# Altium PCB 底板201604281.PcbDoc (part 2 of 2)
Units mm, origin at the board's own origin, x right, y up, seen from the top; angles counter-clockwise.
Board outline 123.5 x 102.51 mm, 2 copper layers (Top Layer, Bottom Layer); 216 components, 211 nets, 709 pads, 236 vias.
Unrouted connection lines stored in the file: 63.
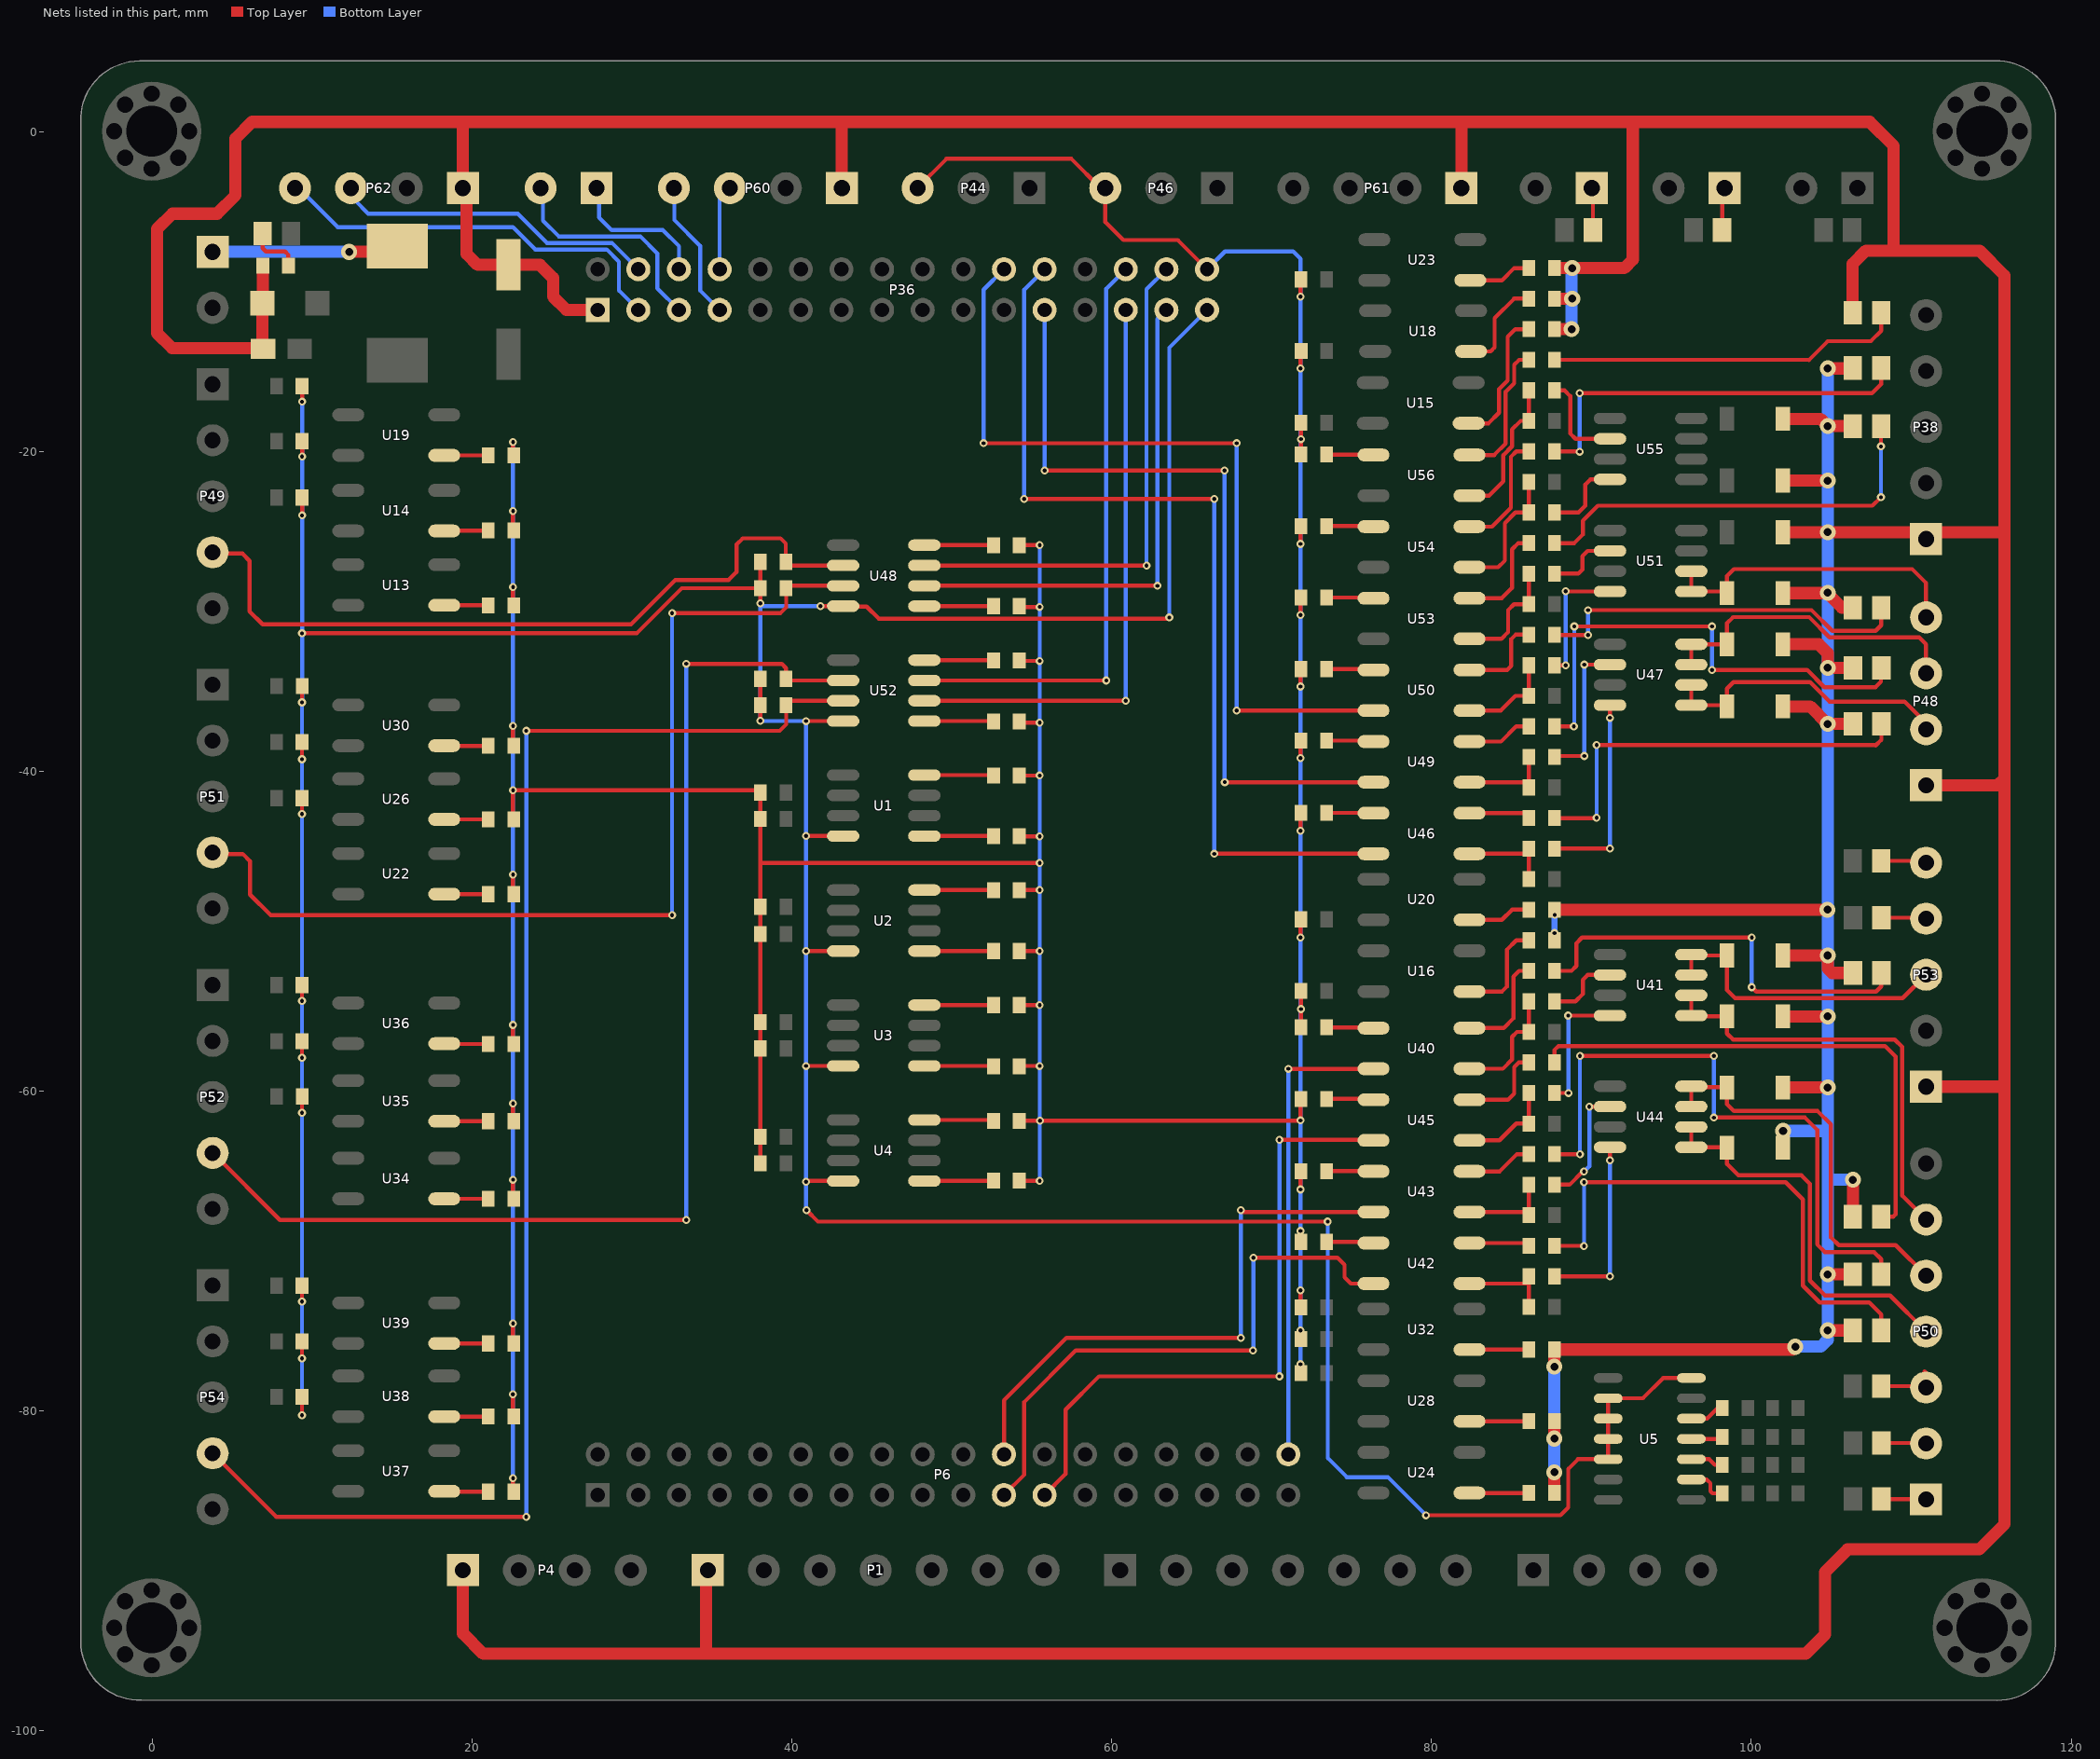
[diagram p2: the nets of this part, all layers, seen from the top]

## Via types
v1: diameter 0.5, hole 0.25, Top Layer to Bottom Layer, 198 vias
v2: diameter 1, hole 0.5, Top Layer to Bottom Layer, 29 vias
v3: diameter 0.6, hole 0.3, Top Layer to Bottom Layer, 9 vias

## Nets (pads, with @x,y where several pads share a name; then routed paths per layer and width w, separated by ;. In a path a pad name is that pad's centre, name@x,y a point inside that pad or via, vN(x,y) a via of type N, cw(c..) or ccw(c..) an arc to the next point about the centre after c; other vN are vias at no path point) (continued)
NetD39_K: D39.K R97.1 | length 32
  Top Layer w0.254: R97.1@87.681,-69.662 89.525,-69.662 v1(89.535,-69.672) ; v1(89.535,-65.684) 102.143,-65.684 103.226,-66.767 103.226,-72.161 104.267,-73.203 107.366,-73.203 108.119,-73.956 D39.K@108.119,-74.955
  Bottom Layer w0.254: v1(89.535,-69.672) v1(89.535,-65.684)
NetD40_K: D40.K R101.2 | length 26.3
  Top Layer w0.254: R101.2@87.681,-52.47 88.754,-52.47 89.052,-52.172 89.052,-50.749 89.408,-50.394 v1(100.025,-50.394) ; v1(100.025,-53.492) 100.305,-53.772 107.798,-53.772 108.119,-53.45 108.119,-52.629 D40.K@108.128,-52.638
  Bottom Layer w0.254: v1(100.025,-53.492) v1(100.025,-50.394)
NetD41_A: D41.A R106.2 | length 3.4
  Top Layer w0.254: D41.A@6.908,-6.375 6.908,-7.289 7.112,-7.493 8.306,-7.493 8.522,-7.709 R106.2@8.522,-8.382
NetD42_K: D42.K R105.1 | length 39.3
  Top Layer w0.254: R105.1@87.681,-63.931 v1(89.28,-63.931) ; v1(89.28,-57.786) v1(97.663,-57.785) ; v1(97.663,-61.646) 103.353,-61.646 104.115,-62.408 104.115,-69.571 104.597,-70.053 107.671,-70.053 108.119,-70.502 D42.K@108.119,-71.45
  Bottom Layer w0.254: v1(89.28,-63.931) v1(89.28,-57.786) ; v1(97.663,-61.646) v1(97.663,-57.785)
NetD43_K: D43.K R110.2 | length 33.3
  Top Layer w0.254: R110.2@87.681,-58.2 87.681,-57.429 87.935,-57.175 108.356,-57.175 109.017,-57.836 109.017,-67.691 108.864,-67.843 D43.K@108.119,-67.843
NetD49_K: D49.K R114.1 | length 26.1
  Top Layer w0.254: R114.1@87.681,-42.919 90.304,-42.919 v1(90.322,-42.901) ; v1(90.322,-38.354) 107.747,-38.354 107.772,-38.379 108.129,-38.023 D49.K@108.129,-37.033
  Bottom Layer w0.254: v1(90.322,-42.901) v1(90.322,-38.354)
NetD51_K: D51.K R120.1 | length 30.8
  Top Layer w0.254: R120.1@87.681,-37.188 87.683,-37.186 v1(88.9,-37.186) ; v1(88.925,-30.937) v1(97.536,-30.937) ; v1(97.536,-33.655) 103.48,-33.655 104.559,-34.734 107.759,-34.734 108.102,-34.392 108.102,-33.554 D51.K@108.129,-33.528
  Bottom Layer w0.254: v1(88.9,-37.186) 88.925,-37.16 v1(88.925,-30.937) ; v1(97.536,-33.655) v1(97.536,-30.937)
NetD54_K: D54.K R126.1 | length 26.6
  Top Layer w0.254: R126.1@87.681,-25.727 88.929,-25.727 89.459,-25.197 89.459,-24.333 90.399,-23.393 107.569,-23.393 v1(108.102,-22.86) ; v1(108.102,-19.685) 108.102,-18.432 D54.K@108.119,-18.415
  Bottom Layer w0.254: v1(108.102,-22.86) v1(108.102,-19.685)
NetD57_K: D57.K R131.1 | length 23.8
  Top Layer w0.254: R131.1@87.681,-31.457 87.694,-31.471 v1(89.789,-31.471) ; v1(89.789,-29.921) 103.759,-29.921 105.054,-31.217 107.772,-31.217 108.119,-30.87 D57.K@108.119,-29.769
  Bottom Layer w0.254: v1(89.789,-31.471) v1(89.789,-29.921)
NetD58_K: D58.K R138.1 | length 25.3
  Top Layer w0.254: R138.1@87.681,-19.996 89.236,-19.996 v1(89.256,-20.015) ; v1(89.256,-16.358) 107.544,-16.358 108.119,-15.782 D58.K@108.119,-14.783
  Bottom Layer w0.254: v1(89.256,-20.015) v1(89.256,-16.358)
NetD59_K: D59.K R142.1 | length 22.3
  Top Layer w0.254: R142.1@87.681,-14.265 103.565,-14.265 ; 103.591,-14.291 104.775,-13.106 107.467,-13.106 108.119,-12.455 D59.K@108.119,-11.328
NetR1_2: R1.2 U5.12 | length 2.2
  Top Layer w0.254: U5.12@96.245,-80.467 97.231,-80.467 97.892,-79.807 R1.2@98.184,-79.807
NetR2_2: R2.2 U5.11 | length 2
  Top Layer w0.254: U5.11@96.245,-81.737 98.057,-81.737 R2.2@98.184,-81.61
NetR3_2: R3.2 U5.10 | length 2.1
  Top Layer w0.254: U5.10@96.245,-83.007 97.358,-83.007 97.714,-83.363 R3.2@98.184,-83.363
NetR4_2: R4.2 U5.9 | length 2.6
  Top Layer w0.254: U5.9@96.245,-84.277 97.206,-84.277 97.434,-84.506 97.434,-85.014 97.561,-85.141 R4.2@98.184,-85.141
NetR11_1: R11.1 U1.4 | length 4.3
  Top Layer w0.254: U1.4@48.285,-40.234 52.591,-40.234 R11.1@52.616,-40.259
NetR12_1: R12.1 U2.4 | length 4.3
  Top Layer w0.254: U2.4@48.285,-47.422 R12.1@52.616,-47.422
NetR17_1: R17.1 U1.1 | length 4.3
  Top Layer w0.254: U1.1@48.285,-44.044 R17.1@52.616,-44.044
NetR18_1: R18.1 U2.1 | length 4.3
  Top Layer w0.254: U2.1@48.285,-51.232 R18.1@52.616,-51.232
NetR19_1: R19.1 U3.4 | length 4.3
  Top Layer w0.254: U3.4@48.285,-54.61 R19.1@52.616,-54.61
NetR20_1: R20.1 U4.4 | length 4.4
  Top Layer w0.254: U4.4@48.285,-61.798 52.565,-61.798 R20.1@52.616,-61.849
NetR25_1: R25.1 U3.1 | length 4.3
  Top Layer w0.254: U3.1@48.285,-58.42 52.591,-58.42 R25.1@52.616,-58.445
NetR26_1: R26.1 U4.1 | length 4.3
  Top Layer w0.254: U4.1@48.285,-65.608 52.591,-65.608 R26.1@52.616,-65.583
NetR42_1: R42.1 U13.1 | length 2.7
  Top Layer w0.254: U13.1@18.263,-29.616 R42.1@20.942,-29.616
NetR44_1: R44.1 U14.1 | length 2.7
  Top Layer w0.254: U14.1@18.288,-24.943 R44.1@20.942,-24.943
NetR46_1: R46.1 U15.1 | length 8.7
  Top Layer w0.254: U15.1@82.321,-18.237 83.566,-18.237 84.226,-17.577 84.226,-16.104 84.76,-15.57 84.76,-12.827 85.232,-12.355 R46.1@86.081,-12.355
NetR47_1: R47.1 U16.1 | length 6.4
  Top Layer w0.254: U16.1@82.372,-53.762 84.414,-53.762 84.709,-53.467 84.709,-51.156 85.305,-50.559 R47.1@86.081,-50.559
NetR52_1: R52.1 U18.1 | length 6
  Top Layer w0.254: U18.1@82.474,-13.741 83.693,-13.741 83.947,-13.487 83.947,-11.659 85.161,-10.445 R52.1@86.081,-10.445
NetR53_1: R53.1 U19.1 | length 2.8
  Top Layer w0.254: U19.1@18.263,-20.244 R53.1@21.019,-20.244
NetR55_1: R55.1 U20.1 | length 4
  Top Layer w0.254: U20.1@82.372,-49.283 84.397,-49.283 85.031,-48.649 R55.1@86.081,-48.649
NetR60_1: R60.1 U22.1 | length 2.7
  Top Layer w0.254: U22.1@18.263,-47.676 R60.1@20.968,-47.676
NetR62_1: R62.1 U23.1 | length 4
  Top Layer w0.254: U23.1@82.423,-9.296 84.404,-9.296 85.166,-8.534 R62.1@86.081,-8.534
NetR63_1: R63.1 U24.1 | length 3.7
  Top Layer w0.254: U24.1@82.372,-85.115 R63.1@86.081,-85.115 R63.1@86.055,-85.141
NetR68_1: R68.1 U26.1 | length 2.7
  Top Layer w0.254: U26.1@18.263,-43.002 R68.1@20.968,-43.002
NetR71_1: R71.1 U28.1 | length 3.7
  Top Layer w0.254: U28.1@82.372,-80.636 86.064,-80.636 R71.1@86.081,-80.62
NetR76_1: R76.1 U30.1 | length 2.6
  Top Layer w0.254: U30.1@18.274,-38.405 R76.1@20.866,-38.405
NetR79_1: R79.1 U32.1 | length 3.7
  Top Layer w0.254: U32.1@82.372,-76.157 86.073,-76.157 R79.1@86.081,-76.149
NetR84_1: R84.1 U34.1 | length 2.7
  Top Layer w0.254: U34.1@18.263,-66.726 R84.1@20.968,-66.726
NetR86_1: R86.1 U35.1 | length 2.7
  Top Layer w0.254: U35.1@18.263,-61.874 R86.1@20.968,-61.874
NetR88_1: R88.1 U36.1 | length 2.7
  Top Layer w0.254: U36.1@18.288,-57.048 R88.1@20.968,-57.048
NetR90_1: R90.1 U37.1 | length 2.7
  Top Layer w0.254: U37.1@18.288,-85.039 R90.1@20.968,-85.039
NetR92_1: R92.1 U38.1 | length 2.7
  Top Layer w0.254: U38.1@18.263,-80.34 R92.1@20.968,-80.34
NetR94_1: R94.1 U39.1 | length 2.7
  Top Layer w0.254: U39.1@18.263,-75.768 R94.1@20.968,-75.768
NetR96_1: R96.1 U40.1 | length 2.9
  Top Layer w0.254: R96.1@73.431,-56.007 U40.1@76.328,-56.007
NetR97_2: R97.2 U42.4 | length 3.8
  Top Layer w0.254: U42.4@82.372,-69.488 85.907,-69.488 R97.2@86.081,-69.662
NetR98_2: R98.2 R99.2 U40.3 | length 7.4
  Top Layer w0.254: U40.3@82.372,-58.591 84.462,-58.591 85.039,-58.014 85.039,-56.591 85.34,-56.29 R99.2@86.081,-56.29 R98.2@86.081,-54.38
NetR100_1: R100.1 U42.1 | length 2.9
  Top Layer w0.254: R100.1@73.431,-69.418 U42.1@76.302,-69.418
NetR101_1: R101.1 U40.4 | length 6.7
  Top Layer w0.254: U40.4@82.372,-56.051 84.513,-56.051 85.115,-55.448 85.115,-52.832 85.478,-52.47 R101.1@86.081,-52.47
NetR102_2: R102.2 R103.2 U42.3 | length 5.5
  Top Layer w0.254: U42.3@82.372,-72.028 R102.2@85.998,-72.028 ; R103.2@86.081,-73.482 R102.2@86.081,-71.572
NetR104_1: R104.1 U43.1 | length 2.9
  Top Layer w0.254: R104.1@73.431,-64.999 U43.1@76.362,-64.999
NetR105_2: R105.2 U43.4 | length 4.2
  Top Layer w0.254: U43.4@82.372,-65.009 84.267,-65.009 85.345,-63.931 R105.2@86.081,-63.931
NetR107_2: R107.2 R108.2 U43.3 | length 5.7
  Top Layer w0.254: U43.3@82.372,-67.549 85.878,-67.549 R108.2@86.081,-67.752 R107.2@86.081,-65.841
NetR109_1: R109.1 U45.1 | length 2.9
  Top Layer w0.254: R109.1@73.431,-60.477 U45.1@76.32,-60.477
NetR110_1: R110.1 U45.4 | length 5.6
  Top Layer w0.254: U45.4@82.372,-60.53 84.783,-60.53 85.166,-60.147 85.166,-58.496 85.462,-58.2 R110.1@86.081,-58.2
NetR111_2: R111.2 R112.2 U45.3 | length 6.1
  Top Layer w0.254: U45.3@82.372,-63.07 84.25,-63.07 85.299,-62.021 R112.2@86.081,-62.021 R111.2@86.081,-60.111
NetR113_1: R113.1 U46.1 | length 2.9
  Top Layer w0.254: R113.1@73.431,-42.596 U46.1@76.354,-42.596
NetR114_2: R114.2 U46.4 | length 3.4
  Top Layer w0.254: U46.4@82.372,-42.614 R114.2@85.776,-42.614
NetR115_1: R115.1 U48.4 | length 4.3
  Top Layer w0.254: U48.4@48.285,-25.857 R115.1@52.616,-25.857
NetR116_2: R116.2 R118.2 U46.3 | length 5.8
  Top Layer w0.254: U46.3@82.372,-45.154 85.756,-45.154 R116.2@86.081,-44.829 R118.2@86.081,-46.739
NetR119_1: R119.1 U49.1 | length 2.9
  Top Layer w0.254: R119.1@73.431,-38.075 U49.1@76.312,-38.075
NetR120_2: R120.2 U49.4 | length 4.1
  Top Layer w0.254: U49.4@82.372,-38.135 84.344,-38.135 85.291,-37.188 R120.2@86.081,-37.188
NetR122_1: R122.1 U48.1 | length 4.3
  Top Layer w0.254: U48.1@48.285,-29.667 R122.1@52.616,-29.667
NetR123_2: R123.2 R124.2 U49.3 | length 5.8
  Top Layer w0.254: U49.3@82.372,-40.675 85.747,-40.675 R124.2@86.081,-41.008 R123.2@86.081,-39.098
NetR125_1: R125.1 U50.1 | length 2.9
  Top Layer w0.254: R125.1@73.431,-33.604 U50.1@76.321,-33.604
NetR126_2: R126.2 U53.4 | length 6.6
  Top Layer w0.254: U53.4@82.372,-29.177 84.387,-29.177 85.039,-28.524 85.039,-26.111 85.424,-25.727 R126.2@86.081,-25.727
NetR127_2: R127.2 R128.2 U50.3 | length 6
  Top Layer w0.254: U50.3@82.372,-36.196 84.327,-36.196 85.245,-35.278 R128.2@86.081,-35.278 R127.2@86.081,-33.367
NetR129_1: R129.1 U52.4 | length 4.3
  Top Layer w0.254: U52.4@48.285,-33.045 52.591,-33.045 R129.1@52.616,-33.071
NetR130_1: R130.1 U53.1 | length 2.9
  Top Layer w0.254: R130.1@73.431,-29.134 U53.1@76.329,-29.134
NetR131_2: R131.2 U50.4 | length 5.6
  Top Layer w0.254: U50.4@82.372,-33.656 84.734,-33.656 84.988,-33.401 84.988,-31.725 85.256,-31.457 R131.2@86.081,-31.457
NetR133_2: R133.2 R135.2 U53.3 | length 7.3
  Top Layer w0.254: U53.3@82.372,-31.717 84.361,-31.717 84.785,-31.293 84.785,-29.921 85.159,-29.547 R135.2@86.081,-29.547 R133.2@86.081,-27.637
NetR136_1: R136.1 U52.1 | length 4.3
  Top Layer w0.254: U52.1@48.285,-36.855 52.591,-36.855 R136.1@52.616,-36.881
NetR137_1: R137.1 U54.1 | length 2.9
  Top Layer w0.254: R137.1@73.431,-24.663 U54.1@76.338,-24.663
NetR138_2: R138.2 U54.4 | length 7.5
  Top Layer w0.254: U54.4@82.372,-24.698 83.786,-24.698 84.963,-23.52 84.963,-20.326 85.294,-19.996 R138.2@86.081,-19.996
NetR139_2: R139.2 R140.2 U54.3 | length 8.4
  Top Layer w0.254: U54.3@82.372,-27.238 84.167,-27.238 84.582,-26.822 84.582,-24.476 85.242,-23.816 R139.2@86.081,-23.816 R140.2@86.081,-21.906
NetR141_1: R141.1 U56.1 | length 2.9
  Top Layer w0.254: R141.1@73.431,-20.193 U56.1@76.347,-20.193
NetR142_2: R142.2 U56.4 | length 8.7
  Top Layer w0.254: U56.4@82.372,-20.218 83.922,-20.218 84.633,-19.507 84.633,-16.272 85.166,-15.739 85.166,-14.58 85.481,-14.265 R142.2@86.081,-14.265
NetR143_2: R143.2 R144.2 U56.3 | length 9.1
  Top Layer w0.254: U56.3@82.372,-22.758 83.591,-22.758 84.48,-21.869 84.48,-20.234 85.039,-19.676 85.039,-18.618 85.572,-18.086 R144.2@86.081,-18.086 R143.2@86.081,-16.175
O13: R98.1 U41.2 | length 4.7
  Top Layer w0.254: R98.1@87.681,-54.38 89.003,-54.38 89.459,-53.924 89.459,-53.035 89.764,-52.73 U41.2@91.161,-52.73
O14: R102.1 U44.4 | length 11.6
  Top Layer w0.254: R102.1@87.681,-71.572 87.686,-71.577 v1(91.161,-71.577) ; v1(91.161,-64.313) U44.4@91.161,-63.5
  Bottom Layer w0.254: v1(91.161,-71.577) v1(91.161,-64.313)
O15: R107.1 U44.2 | length 7.7
  Top Layer w0.254: R107.1@87.681,-65.841 88.629,-65.841 89.447,-65.024 v1(89.535,-65.024) ; v1(89.865,-60.96) U44.2@91.161,-60.96
  Bottom Layer w0.254: v1(89.535,-65.024) 89.865,-64.694 v1(89.865,-60.96)
O16: R111.1 U41.4 | length 8.6
  Top Layer w0.254: R111.1@87.681,-60.111 v1(88.556,-60.111) ; v1(88.544,-55.27) U41.4@91.161,-55.27 U41.4@90.994,-55.437
  Bottom Layer w0.254: v1(88.544,-55.27) 88.556,-55.282 v1(88.556,-60.111)
O17: R116.1 U47.4 | length 12.5
  Top Layer w0.254: R116.1@87.683,-44.831 87.708,-44.806 87.734,-44.831 v1(91.161,-44.831) ; v1(91.161,-36.652) U47.4@91.161,-35.865
  Bottom Layer w0.254: v1(91.161,-44.831) v1(91.161,-36.652)
O18: R123.1 U47.2 | length 9.2
  Top Layer w0.254: R123.1@87.681,-39.098 87.739,-39.04 v1(89.56,-39.04) ; v1(89.56,-33.325) U47.2@91.161,-33.325
  Bottom Layer w0.254: v1(89.56,-39.04) v1(89.56,-33.325)
O19: R127.1 U51.4 | length 8.1
  Top Layer w0.254: R127.1@87.681,-33.367 v1(88.384,-33.367) ; v1(88.384,-28.736) 88.401,-28.753 U51.4@91.161,-28.753
  Bottom Layer w0.254: v1(88.384,-33.367) v1(88.384,-28.736)
O20: R133.1 U51.2 | length 4.6
  Top Layer w0.254: R133.1@87.681,-27.637 89.178,-27.637 89.433,-27.381 89.433,-26.543 89.764,-26.213 U51.2@91.161,-26.213
O21: R139.1 U55.4 | length 5.1
  Top Layer w0.254: R139.1@87.681,-23.816 89.188,-23.816 89.611,-23.393 89.611,-22.073 89.941,-21.742 U55.4@91.161,-21.742
O22: R143.1 U55.2 | length 6.1
  Top Layer w0.254: R143.1@87.681,-16.175 88.311,-16.175 88.671,-16.535 88.671,-18.872 89.002,-19.202 U55.2@91.161,-19.202
PW_VCC: D1.1 J4.1 | length 11.8
  Top Layer w0.762: J4.1@3.785,-7.518 J4.1@3.835,-7.468 ; v2(12.319,-7.518) 14.973,-7.518 D1.1@15.342,-7.15
  Bottom Layer w0.762: J4.1@3.785,-7.518 v2(12.319,-7.518)
PWM1: P36.30 U48.3 | length 32.9
  Top Layer w0.254: U48.3@48.285,-27.127 v1(62.179,-27.127)
  Bottom Layer w0.254: v1(62.179,-27.127) 62.179,-9.855 P36.30@63.424,-8.611
PWM2: P36.29 U48.2 | length 32.1
  Top Layer w0.254: U48.2@48.285,-28.397 v1(62.865,-28.397)
  Bottom Layer w0.254: v1(62.865,-28.397) 62.865,-11.709 P36.29@63.424,-11.151
PWM3: P36.28 U52.3 | length 37.6
  Top Layer w0.254: U52.3@48.285,-34.315 v1(59.665,-34.315)
  Bottom Layer w0.254: v1(59.665,-34.315) 59.665,-9.83 P36.28@60.884,-8.611
PWM4: P36.27 U52.2 | length 37
  Top Layer w0.254: U52.2@48.285,-35.585 v1(60.884,-35.585)
  Bottom Layer w0.254: v1(60.884,-35.585) P36.27@60.884,-11.151
PWM11: P49.4 R117.1 U48.6 | length 47.7
  Top Layer w0.254: P49.4@3.785,-26.383 5.664,-26.383 ; 5.664,-26.408 6.096,-26.84 6.096,-29.997 6.909,-30.81 29.947,-30.81 32.715,-28.042 36.043,-28.042 36.551,-27.534 36.551,-25.806 36.932,-25.425 39.294,-25.425 39.624,-25.756 39.624,-26.886 R117.1@39.637,-26.899 39.865,-27.127 U48.6@43.205,-27.127
PWM22: P51.4 R121.2 U48.7 | length 62.5
  Top Layer w0.254: P51.4@3.785,-45.162 5.664,-45.162 6.121,-45.619 6.121,-47.701 7.417,-48.997 v1(32.512,-48.997) ; v1(32.512,-30.099) 39.294,-30.099 39.649,-29.743 39.649,-28.613 39.637,-28.6 39.84,-28.397 U48.7@43.205,-28.397
  Bottom Layer w0.254: v1(32.512,-48.997) v1(32.512,-30.099)
PWM33: P52.4 R132.1 U52.6 | length 76.8
  Top Layer w0.254: P52.4@3.785,-63.839 7.992,-68.047 v1(33.401,-68.047) ; v1(33.401,-33.274) 39.37,-33.274 39.637,-33.541 R132.1@39.637,-34.214 39.738,-34.315 U52.6@43.205,-34.315
  Bottom Layer w0.254: v1(33.401,-68.047) v1(33.401,-33.274)
PWM44: P54.4 R134.2 U52.7 | length 91.7
  Top Layer w0.254: P54.4@3.785,-82.636 7.763,-86.614 v1(23.393,-86.614) ; v1(23.393,-37.465) 39.243,-37.465 39.649,-37.059 39.649,-35.878 R134.2@39.637,-35.865 39.916,-35.585 U52.7@43.205,-35.585
  Bottom Layer w0.254: v1(23.393,-86.614) v1(23.393,-37.465)
QD_KR1: D22.K P43.1 | length 2.6
  Top Layer w0.254: P43.1@90.043,-3.531 90.095,-3.582 D22.K@90.095,-6.147
QYG_KC1: P6.36 U40.2 | length 29.4
  Top Layer w0.254: v1(71.044,-58.598) U40.2@76.365,-58.598
  Bottom Layer w0.254: P6.36@71.044,-82.702 v1(71.044,-58.598)
QYG_KC11: D56.1 P53.3 U41.7 U41.8 | length 18.9
  Top Layer w0.254: U41.7@96.241,-52.73 96.241,-51.511 D56.1@98.476,-51.511 98.476,-53.67 98.984,-54.178 109.459,-54.178 P53.3@110.922,-52.715
QYG_KR1: D15.K P53.4 | length 2.9
  Top Layer w0.254: D15.K@108.129,-49.149 P53.4@110.855,-49.149 ; P53.4@110.83,-48.463 P53.4@110.922,-48.555
QYG_KR2: D19.K P53.5 | length 2.7
  Top Layer w0.254: D19.K@108.119,-45.593 P53.5@110.799,-45.593 ; P53.5@110.901,-45.034 P53.5@110.922,-45.055
RS485_1A: P36.7 P60.4 | length 8.8
  Bottom Layer w0.254: P60.4@32.655,-3.531 32.655,-5.527 34.265,-7.137 34.265,-9.931 P36.7@35.484,-11.151
RS485_1B: P36.8 P60.3 | length 5.3
  Bottom Layer w0.254: P36.8@35.484,-8.611 35.484,-4.176 P60.3@36.129,-3.531
SSD_KC1: P36.24 U46.2 | length 58.9
  Top Layer w0.254: v1(54.534,-22.962) v1(66.421,-22.962) ; v1(66.421,-45.154) U46.2@76.372,-45.154
  Bottom Layer w0.254: v1(54.534,-22.962) 54.534,-9.881 P36.24@55.804,-8.611 ; v1(66.421,-45.154) v1(66.421,-22.962)
SSD_KC2: P36.23 U49.2 | length 50.1
  Top Layer w0.254: v1(55.804,-21.184) v1(67.056,-21.184) ; v1(67.072,-40.675) U49.2@76.372,-40.675
  Bottom Layer w0.254: v1(55.804,-21.184) P36.23@55.804,-11.151 ; v1@67.056,-40.675 v1(67.056,-21.184)
SSD_KC3: P36.22 U50.2 | length 52.5
  Top Layer w0.254: v1(51.994,-19.482) v1(67.818,-19.482) ; v1(67.819,-36.196) U50.2@76.372,-36.196
  Bottom Layer w0.254: v1(51.994,-19.482) 51.994,-9.881 P36.22@53.264,-8.611 ; v1(67.819,-36.196) v1(67.818,-19.482)
SSD_KC11: D46.1 P48.2 U47.5 U47.6 | length 18.2
  Top Layer w0.254: U47.6@96.241,-34.595 U47.5@96.241,-35.865 98.374,-35.865 98.476,-35.763 98.476,-34.823 98.882,-34.417 103.667,-34.417 104.886,-35.636 109.57,-35.636 P48.2@110.922,-36.988
SSD_KC22: D48.1 P48.3 U47.7 U47.8 | length 19.6
  Top Layer w0.254: U47.7@96.241,-33.325 U47.8@96.241,-32.055 98.374,-32.055 98.425,-32.106 D48.1@98.476,-32.055 98.476,-30.734 98.857,-30.353 103.616,-30.353 104.886,-31.623 110.49,-31.623 110.922,-32.055 P48.3@110.922,-33.488
SSD_KC33: D50.1 P48.4 U51.5 U51.6 | length 19.4
  Top Layer w0.254: U51.6@96.241,-27.483 U51.5@96.241,-28.753 98.374,-28.753 D50.1@98.476,-28.854 98.476,-27.788 98.908,-27.356 110.058,-27.356 110.922,-28.219 P48.4@110.922,-29.988
TXX_KC1: P6.21 U42.2 | length 36.4
  Top Layer w0.254: P6.21@53.264,-85.242 54.534,-83.972 54.534,-79.426 57.76,-76.2 v1(68.834,-76.2) ; v1(68.855,-70.409) 74.117,-70.409 74.559,-70.85 74.559,-71.638 74.949,-72.028 U42.2@76.372,-72.028
  Bottom Layer w0.254: v1(68.834,-76.2) 68.855,-76.179 v1(68.855,-70.409)
TXX_KC2: P6.22 U43.2 | length 36.1
  Top Layer w0.254: P6.22@53.264,-82.702 53.264,-79.324 57.175,-75.413 v1(68.072,-75.413) ; v1(68.072,-67.437) 68.184,-67.549 U43.2@76.372,-67.549
  Bottom Layer w0.254: v1(68.072,-75.413) v1(68.072,-67.437)
TXX_KC3: P6.23 U45.2 | length 40.7
  Top Layer w0.254: P6.23@55.804,-85.242 57.125,-83.922 57.125,-79.908 59.207,-77.826 v1(70.485,-77.826) ; v1(70.485,-63.043) U45.2@76.345,-63.043
  Bottom Layer w0.254: v1(70.485,-77.826) v1(70.485,-63.043)
TXX_KC11: D52.1 P50.4 U44.5 U44.6 | length 24.9
  Top Layer w0.254: U44.6@96.241,-62.23 U44.5@96.241,-63.5 98.45,-63.5 D52.1@98.476,-63.525 98.476,-64.541 99.187,-65.253 103.124,-65.253 103.657,-65.786 103.657,-71.831 104.597,-72.771 108.671,-72.771 P50.4@110.922,-75.022
TXX_KC22: D53.1 P50.5 U44.7 U44.8 | length 25.5
  Top Layer w0.254: U44.7@96.241,-60.96 96.241,-59.741 98.45,-59.741 D53.1@98.476,-59.766 98.476,-60.808 98.908,-61.239 104.14,-61.239 104.978,-62.078 104.978,-69.139 105.461,-69.621 109.021,-69.621 P50.5@110.922,-71.522
TXX_KC33: D55.1 P50.6 U41.5 U41.6 | length 27.3
  Top Layer w0.254: U41.6@96.241,-54 U41.5@96.241,-55.27 96.241,-55.321 D55.1@98.476,-55.321 98.476,-56.388 98.857,-56.769 108.966,-56.769 109.423,-57.226 109.423,-66.523 P50.6@110.922,-68.022
TXX_KR1: D23.K P50.1 | length 2.8
  Top Layer w0.254: D23.K@108.129,-85.496 P50.1@110.896,-85.496
TXX_KR2: D27.K P50.2 | length 2.8
  Top Layer w0.254: D27.K@108.129,-81.991 P50.2@110.891,-81.991
TXX_KR3: D32.K P50.3 | length 2.8
  Top Layer w0.254: D32.K@108.119,-78.435 P50.3@110.835,-78.435 ; 110.835,-77.521 P50.3@110.922,-77.607
TZ_KR1: D18.K P45.1 | length 2.6
  Top Layer w0.254: P45.1@98.146,-3.531 98.172,-3.557 D18.K@98.172,-6.147
U1_RX: P36.5 P42.2 | length 14.1
  Bottom Layer w0.254: P42.2@24.44,-3.531 24.44,-5.568 25.425,-6.553 30.531,-6.553 31.598,-7.62 31.598,-9.804 P36.5@32.944,-11.151
U1_TX: P36.6 P42.1 | length 9
  Bottom Layer w0.254: P42.1@27.94,-3.531 27.94,-5.359 28.727,-6.147 31.928,-6.147 32.944,-7.163 P36.6@32.944,-8.611
U2_RX: P36.3 P62.4 | length 25.5
  Bottom Layer w0.254: P62.4@9.16,-3.531 11.598,-5.969 22.555,-5.969 23.952,-7.366 28.423,-7.366 29.185,-8.128 29.185,-9.931 P36.3@30.404,-11.151
U2_TX: P36.4 P62.3 | length 20.3
  Bottom Layer w0.254: P62.3@12.66,-3.531 12.66,-4.278 13.513,-5.131 22.86,-5.131 24.689,-6.96 28.753,-6.96 P36.4@30.404,-8.611
VCC3.3_B: P36.32 P44.3 P46.3 R11.2 R12.2 R13.2 R14.2 R15.1 R16.1 R17.2 R18.2 R19.2 R20.2 R21.2 R22.2 R23.1 R24.1 R25.2 R26.2 R42.2 R44.2 R49.2 R50.2 R53.2 R57.2 R58.2 R60.2 R65.2 R66.2 R68.2 R74.2 R76.2 R82.2 R84.2 R86.2 R88.2 R90.2 R92.2 R94.2 R96.2 R100.2 R104.2 R109.2 R113.2 R115.2 R119.2 R122.2 R125.2 R129.2 R130.2 R136.2 R137.2 R141.2 | length 322.5
  Top Layer w0.254: v1(22.555,-78.943) 22.555,-80.328 R92.2@22.568,-80.34 ; R90.2@22.568,-85.039 v1(22.568,-84.188) ; R94.2@22.568,-75.768 v1(22.568,-74.524) ; R84.2@22.568,-66.726 v1(22.568,-65.532) ; R86.2@22.568,-61.874 v1(22.568,-60.757) ; R88.2@22.568,-57.048 v1(22.568,-55.855) ; R60.2@22.568,-47.676 v1(22.568,-46.457) ; R68.2@22.568,-43.002 v1(22.568,-41.173) 37.884,-41.173 R13.2@38.037,-41.326 R15.1@38.037,-42.977 38.037,-45.72 ; R76.2@22.568,-38.303 v1(22.568,-37.16) ; R42.2@22.568,-29.591 v1(22.568,-28.473) ; R44.2@22.568,-24.917 v1(22.568,-23.724) ; v1(22.568,-19.418) 22.568,-20.193 R53.2@22.619,-20.244 ; R24.1@38.037,-64.516 R22.2@38.037,-62.84 R23.1@38.037,-57.328 R21.2@38.037,-55.677 R16.1@38.037,-50.165 R14.2@38.037,-48.463 38.037,-45.72 ; P44.3@47.839,-3.531 49.667,-1.702 57.48,-1.702 59.309,-3.531 P46.3@59.599,-3.531 59.599,-5.649 60.731,-6.782 64.135,-6.782 P36.32@65.964,-8.611 ; R26.2@54.216,-65.583 54.242,-65.608 v1(55.499,-65.608) ; R20.2@54.216,-61.849 v1(55.524,-61.849) v1@71.831,-61.849 ; R25.2@54.216,-58.445 54.242,-58.42 v1(55.499,-58.42) ; R19.2@54.216,-54.61 v1(55.499,-54.61) ; R18.2@54.216,-51.232 v1(55.499,-51.232) ; R12.2@54.216,-47.422 v1(55.499,-47.422) ; R17.2@54.216,-44.044 54.242,-44.069 v1(55.499,-44.069) ; R11.2@54.216,-40.259 v1(55.499,-40.259) ; R136.2@54.216,-36.881 54.292,-36.957 v1(55.499,-36.957) ; R129.2@54.216,-33.071 54.242,-33.096 v1(55.499,-33.096) ; R122.2@54.216,-29.667 54.267,-29.718 v1(55.499,-29.718) ; R115.2@54.216,-25.857 v1(55.499,-25.857) ; v1(55.499,-45.72) 38.037,-45.72 ; R82.2@71.806,-73.482 v1(71.806,-72.441) ; R100.2@71.806,-69.393 v1(71.806,-68.732) ; v1(71.806,-66.142) R104.2@71.806,-65.024 ; v1(71.806,-61.824) R109.2@71.806,-60.503 ; v1(71.806,-50.394) R58.2@71.806,-49.276 ; v1(71.806,-43.713) R113.2@71.806,-42.621 ; v1(71.806,-39.167) R119.2@71.806,-38.1 ; v1(71.806,-34.696) R125.2@71.806,-33.63 ; v1(71.806,-30.226) R130.2@71.806,-29.159 ; v1(71.806,-25.781) R137.2@71.806,-24.689 ; v1(71.806,-14.808) R57.2@71.806,-13.754 ; v1(71.806,-10.312) R65.2@71.806,-9.271 ; R96.2@71.831,-56.007 v1(71.831,-54.864) R50.2@71.831,-53.721 ; R141.2@71.831,-20.193 v1(71.831,-19.228) R49.2@71.831,-18.212
  Bottom Layer w0.254: v1(22.568,-84.188) v1(22.568,-74.524) v1(22.568,-65.532) v1(22.568,-60.757) v1(22.568,-55.855) v1(22.568,-46.457) v1(22.568,-41.173) v1(22.568,-37.16) v1(22.568,-28.473) v1(22.568,-23.724) v1(22.568,-19.418) ; v1(55.499,-65.608) v1(55.499,-25.857) ; P36.32@65.964,-8.611 67.081,-7.493 71.349,-7.493 71.806,-7.95 v1(71.806,-10.312) v1(71.806,-14.808) v1(71.806,-25.781) v1(71.806,-30.226) v1(71.806,-34.696) v1(71.806,-39.167) v1(71.806,-43.713) v1(71.806,-50.394) v1(71.806,-61.824) v1(71.806,-66.142) v1(71.806,-68.732) v1(71.806,-72.441) v1(71.806,-74.955) v1(71.806,-77.064)
VCC5: P36.31 R43.2 R45.2 R54.2 R61.2 R69.2 R77.2 R85.2 R87.2 R89.2 R91.2 R93.2 R95.2 R117.2 R121.1 R132.2 R134.1 U1.8 U2.8 U3.8 U4.8 U5.2 U5.3 U5.4 U5.5 U5.14 U48.8 U52.8 | length 288.6
  Top Layer w0.254: v1(9.373,-80.264) 9.373,-79.119 R91.2@9.377,-79.114 ; v1(9.373,-76.708) 9.373,-75.639 R93.2@9.377,-75.634 ; v1(9.373,-73.152) 9.373,-72.159 R95.2@9.377,-72.155 ; v1(9.373,-61.341) 9.373,-60.338 R85.2@9.385,-60.325 ; v1(9.373,-57.912) 9.373,-56.869 R87.2@9.377,-56.864 ; v1(9.373,-54.356) 9.373,-53.363 R89.2@9.377,-53.359 ; v1(9.373,-42.672) 9.373,-41.679 R61.2@9.377,-41.675 ; v1(9.373,-39.243) 9.373,-38.174 R69.2@9.377,-38.169 ; v1(9.373,-35.687) 9.373,-34.684 R77.2@9.385,-34.671 ; v1(9.373,-31.369) 30.302,-31.369 33.122,-28.55 R121.1@38.037,-28.55 ; v1@9.373,-16.891 v1(9.377,-16.886) R54.2@9.377,-15.919 ; v1(9.377,-23.998) R43.2@9.377,-22.879 ; v1(9.377,-20.315) R45.2@9.377,-19.355 ; v1(38.024,-36.83) 38.037,-36.817 R134.1@38.037,-35.865 R132.2@38.037,-34.214 ; v1(38.024,-29.489) 38.037,-29.477 R121.1@38.037,-28.55 ; R117.2@38.037,-26.899 R121.1@38.037,-28.55 ; v1(40.894,-65.659) 40.945,-65.608 U4.8@43.205,-65.608 ; v1(40.894,-58.42) U3.8@43.205,-58.42 ; v1(40.894,-51.232) U2.8@43.205,-51.232 ; v1(40.894,-44.044) U1.8@43.205,-44.044 ; v1(40.894,-36.855) U52.8@43.205,-36.855 ; v1(40.919,-67.437) 41.631,-68.148 v1(73.508,-68.148) ; v1(41.783,-29.667) U48.8@43.205,-29.667 43.231,-29.693 44.679,-29.693 45.433,-30.447 63.533,-30.447 v1(63.602,-30.378) ; v1(79.654,-86.512) 88.062,-86.512 88.544,-86.03 88.544,-83.617 89.154,-83.007 U5.5@91.045,-83.007 U5.4@91.045,-81.737 U5.3@91.045,-80.467 U5.2@91.045,-79.197 93.218,-79.197 94.488,-77.927 U5.14@96.245,-77.927
  Bottom Layer w0.254: v1(9.373,-80.264) v1(9.373,-76.708) v1(9.373,-73.152) v1(9.373,-61.341) v1(9.373,-57.912) v1(9.373,-54.356) v1(9.373,-42.672) v1(9.373,-39.243) v1(9.373,-35.687) 9.377,-35.682 v1(9.377,-23.998) ; v1@9.373,-24.003 v1(9.377,-23.998) ; v1@9.373,-20.32 v1(9.377,-20.315) ; v1(9.377,-16.886) v1(9.377,-20.315) ; v1(40.919,-67.437) 40.894,-67.412 v1(40.894,-65.659) v1(40.894,-58.42) v1(40.894,-44.044) v1(40.894,-36.855) 38.049,-36.855 v1(38.024,-36.83) v1(38.024,-29.489) 38.202,-29.667 v1(41.783,-29.667) ; v1(63.602,-30.378) 63.602,-13.513 P36.31@65.964,-11.151 ; v1(73.508,-68.148) 73.508,-82.931 74.701,-84.125 77.267,-84.125 v1(79.654,-86.512) ; v1(9.377,-23.998) v1(9.377,-20.315)
VCC24_B: C2.1 C3.1 D39.A D40.A D42.A D43.A D44.2 D45.2 D46.2 D47.2 D48.2 D49.A D50.2 D51.A D52.2 D53.2 D54.A D55.2 D56.2 D57.A D58.A D59.A F1.2 P1.1 P4.1 P36.1 P38.1 P48.1 P53.1 P60.1 P61.1 P62.1 R46.2 R47.2 R52.2 R55.2 R62.2 R63.2 R71.2 R79.2 R106.1 | length 564.3
  Top Layer w0.381: R47.2@87.681,-50.559 87.642,-50.521 R47.2@87.681,-50.482
  Top Layer w0.762: F1.2@6.903,-10.729 6.903,-13.518 C3.1@6.883,-13.538 ; F1.2@6.922,-10.747 R106.1@6.922,-8.382 ; C3.1@6.934,-13.589 C3.1@6.883,-13.538 ; P4.1@19.431,-89.941 19.431,-93.904 20.701,-95.174 34.646,-95.174 ; P62.1@19.431,-3.531 19.431,0.584 ; P62.1@19.66,-3.531 19.66,-7.645 20.345,-8.331 C2.1@22.276,-8.331 24.257,-8.331 25.07,-9.144 25.07,-10.312 25.908,-11.151 P36.1@27.864,-11.151 ; P1.1@34.747,-89.941 34.646,-90.043 34.646,-95.174 ; P60.1@43.129,-3.531 43.129,0.533 ; P61.1@81.864,-3.531 81.864,0.559 ; R63.2@87.681,-85.115 v2(87.681,-83.82) ; v2(87.681,-81.712) R71.2@87.681,-80.62 ; v2(87.681,-77.216) R79.2@87.681,-76.149 102.565,-76.149 v2(102.743,-75.971) ; R55.2@87.681,-48.649 v2(104.758,-48.649) ; R46.2@87.681,-12.355 v2(88.758,-12.355) ; R52.2@87.681,-10.445 v2(88.793,-10.445) ; R62.2@87.681,-8.534 v2(88.798,-8.534) 92.05,-8.534 92.583,-8.001 92.583,0.584 ; D53.2@101.976,-59.766 v2(104.775,-59.766) ; D55.2@101.976,-55.321 v2(104.775,-55.321) ; D56.2@101.976,-51.511 v2(104.775,-51.511) 104.775,-52.324 105.054,-52.603 D40.A@106.349,-52.603 ; D46.2@101.976,-35.941 103.683,-35.941 v2(104.775,-37.033) D49.A@106.349,-37.033 ; D48.2@101.976,-32.055 104.216,-32.055 104.775,-32.614 v2(104.775,-33.528) D51.A@106.349,-33.528 ; D50.2@101.976,-28.854 v2@104.75,-28.854 ; D44.2@101.976,-25.044 v2(104.775,-25.044) 115.824,-25.044 ; D45.2@101.976,-21.819 v2(104.775,-21.819) ; D47.2@101.976,-17.958 104.318,-17.958 v2(104.775,-18.415) D54.A@106.339,-18.415 ; v2(104.775,-74.955) D39.A@106.339,-74.955 ; v2(104.775,-71.45) D42.A@106.339,-71.45 ; v2(104.775,-28.829) v2@104.75,-28.854 ; v2(104.775,-14.808) 106.314,-14.808 D58.A@106.339,-14.783 ; D57.A@106.339,-29.769 105.664,-29.769 v2@104.75,-28.854 ; D59.A@106.339,-11.328 106.324,-11.314 106.324,-8.28 107.163,-7.442 108.839,-7.442 ; D43.A@106.35,-67.833 v2(106.35,-65.532) ; P53.1@110.922,-59.715 115.799,-59.715 115.824,-59.69 ; P48.1@110.922,-40.869 115.392,-40.869 115.824,-40.437 ; C3.1@6.883,-13.538 1.245,-13.538 0.305,-12.598 0.305,-6.096 1.27,-5.131 4.064,-5.131 5.207,-3.988 5.207,-0.432 6.248,0.61 107.391,0.61 108.89,-0.889 108.89,-7.391 108.839,-7.442 ; 34.646,-95.174 103.403,-95.174 104.597,-93.98 104.597,-90.068 106.02,-88.646 114.249,-88.646 115.824,-87.071 115.824,-59.69 ; 108.839,-7.442 114.275,-7.442 115.824,-8.992 115.824,-25.044 ; 115.824,-59.69 115.824,-40.437 ; 115.824,-40.437 115.824,-25.044
  Bottom Layer w0.381: v1(87.681,-50.114) 87.681,-48.997 v1(87.706,-48.971)
  Bottom Layer w0.762: v2(87.681,-83.82) v2(87.681,-81.712) v2(87.681,-77.216) ; v2(88.758,-12.355) v2@88.758,-8.575 ; v2(101.981,-62.484) 104.699,-62.484 104.775,-62.408 ; v2(102.743,-75.971) 104.343,-75.971 104.775,-75.54 v2(104.775,-74.955) 104.775,-65.507 ; v2(104.775,-14.808) v2(104.775,-21.819) v2(104.775,-25.044) v2(104.775,-28.829) v2(104.775,-37.033) v2(104.775,-51.511) v2(104.775,-55.321) v2(104.775,-59.766) 104.775,-62.408 ; v2(106.35,-65.532) 104.8,-65.532 104.775,-65.507 ; 104.775,-65.507 104.775,-62.408
pads on no net: ?.1

## Keep-outs
Keep-Out Layer:
  lines w0.2: -0.792,4.412 ccw(c-0.792,0.731) -4.47,0.61 -4.47,-94.389 ccw(c-0.79,-94.389) -0.669,-98.067 ; -0.792,4.42 115.222,4.42 ; -0.669,-98.069 115.351,-98.08 ; 115.222,4.415 cw(c115.344,0.737) 119.024,0.737 ; 115.351,-98.087 ccw(c115.351,-94.406) 119.03,-94.285 119.03,0.737

## Silkscreen, mask and mechanical layers (free items; w line width, h text height)
Top Overlay:
  text "PWM1" at 5.232,-27.254 h0.8
  text "GND" at 5.232,-30.658 h0.8
  text "PWM2" at 5.232,-46.076 h0.8
  text "GND" at 5.232,-49.479 h0.8
  text "PWM3" at 5.232,-64.618 h0.8
  text "GND" at 5.232,-68.021 h0.8
  text "PWM4" at 5.232,-83.363 h0.8
  text "GND" at 5.232,-86.766 h0.8
Bottom Overlay:
  text "启动" at 91.262,4.163 h2 r90
  text "停止" at 99.466,4.163 h2 r90
  text "急停" at 107.899,4.163 h2 r90
  text "地标RX" at 7.899,-2.337 h2 r270
  text "地标TX" at 11.405,-2.337 h2 r270
  text "GND" at 14.91,-2.337 h2 r270
  text "+24V" at 18.263,-2.337 h2 r270
  text "YY_RX" at 23.241,-2.337 h2 r270
  text "YY_TX" at 26.543,-2.337 h2 r270
  text "CMP-A" at 31.572,-2.337 h2 r270
  text "CMP-B" at 34.95,-2.337 h2 r270
  text "GND" at 38.481,-2.337 h2 r270
  text "+24V" at 41.885,-2.337 h2 r270
  text "3.3V" at 46.787,-2.337 h2 r270
  text "电位器2" at 50.317,-2.337 h2 r270
  text "3.3V" at 58.496,-2.337 h2 r270
  text "电位器1" at 61.976,-2.337 h2 r270
  text "GND" at 65.329,-2.337 h2 r270
  text "CAN_H" at 70.206,-2.337 h2 r270
  text "CAN_L" at 73.762,-2.337 h2 r270
  text "GND" at 77.267,-2.337 h2 r270
  text "+24V" at 80.645,-2.337 h2 r270
  text "GND" at 85.42,-2.337 h2 r270
  text "GND" at 93.675,-2.337 h2 r270
  text "GND" at 101.854,-2.337 h2 r270
  text "GND" at 53.645,-2.362 h2 r270
  text "VCC" at 2.627,-8.611 h2
  text "GND" at 2.627,-12.167 h2
  text "黄" at 118.616,-12.522 h2
  text "绿" at 118.616,-16.053 h2
  text "M1使能" at 2.627,-16.993 h2
  text "红" at 118.616,-19.736 h2
  text "M1方向" at 2.627,-20.396 h2
  text "GND" at 112.116,-20.879 h2 r180
  text "M1刹车" at 2.627,-24.003 h2
  text "+24V" at 112.116,-24.232 h2 r180
  text "PWM1" at 2.627,-27.457 h2
  text "GND" at 2.627,-30.988 h2
  text "黄" at 118.59,-31.394 h2
  text "绿" at 118.59,-34.88 h2
  text "M2使能" at 2.627,-35.839 h2
  text "红" at 118.59,-38.481 h2
  text "M2方向" at 2.627,-39.268 h2
  text "+24V" at 112.116,-39.599 h2 r180
  text "M2刹车" at 2.627,-42.774 h2
  text "PWM2" at 2.627,-46.177 h2
  text "牵开入2" at 118.616,-46.838 h2
  text "GND" at 2.627,-49.682 h2
  text "牵开入1" at 118.616,-50.394 h2
  text "牵开出1" at 118.616,-53.823 h2
  text "M3使能" at 2.627,-54.559 h2
  text "GND" at 112.116,-54.839 h2 r180
  text "M3方向" at 2.627,-57.912 h2
  text "+24V" at 112.116,-58.344 h2 r180
  text "M3刹车" at 2.627,-61.316 h2
  text "GND" at 112.116,-63.373 h2 r180
  text "PWM3" at 2.627,-64.795 h2
  text "GND" at 2.627,-68.428 h2
  text "开出3" at 118.616,-69.19 h2
  text "开出2" at 118.616,-72.771 h2
  text "M4使能" at 2.602,-73.381 h2
  text "开出1" at 118.616,-76.23 h2
  text "M4方向" at 2.602,-76.835 h2
  text "开入3" at 118.618,-79.731 h2
  text "M4刹车" at 2.602,-80.34 h2
  text "开入2" at 118.618,-83.287 h2
  text "PWM4" at 2.602,-83.769 h2
  text "IO板V1.2-20170110" at 23.901,-85.874 h2
  text "开入1" at 118.616,-86.716 h2
  text "GND" at 2.602,-87.274 h2
  text "http://www.chenghe.info/" at 26.596,-88.444 h2
  text "+24V" at 20.777,-91.161 h2 r90
  text "GND" at 24.333,-91.161 h2 r90
  text "CAN2-H" at 27.813,-91.161 h2 r90
  text "CAN2-L" at 31.267,-91.161 h2 r90
  text "+24V" at 35.992,-91.161 h2 r90
  text "GND" at 39.421,-91.161 h2 r90
  text "T9-1" at 46.584,-91.161 h2 r90
  text "T9-2" at 50.089,-91.161 h2 r90
  text "T3-1" at 56.998,-91.161 h2 r90
  text "T3-2" at 61.773,-91.161 h2 r90
  text "T1-1" at 65.202,-91.161 h2 r90
  text "T1-2" at 72.314,-91.161 h2 r90
  text "T1-3" at 75.743,-91.161 h2 r90
  text "T1-4" at 79.249,-91.161 h2 r90